# EAGLE board Power module (EAGLE 9.3.1)
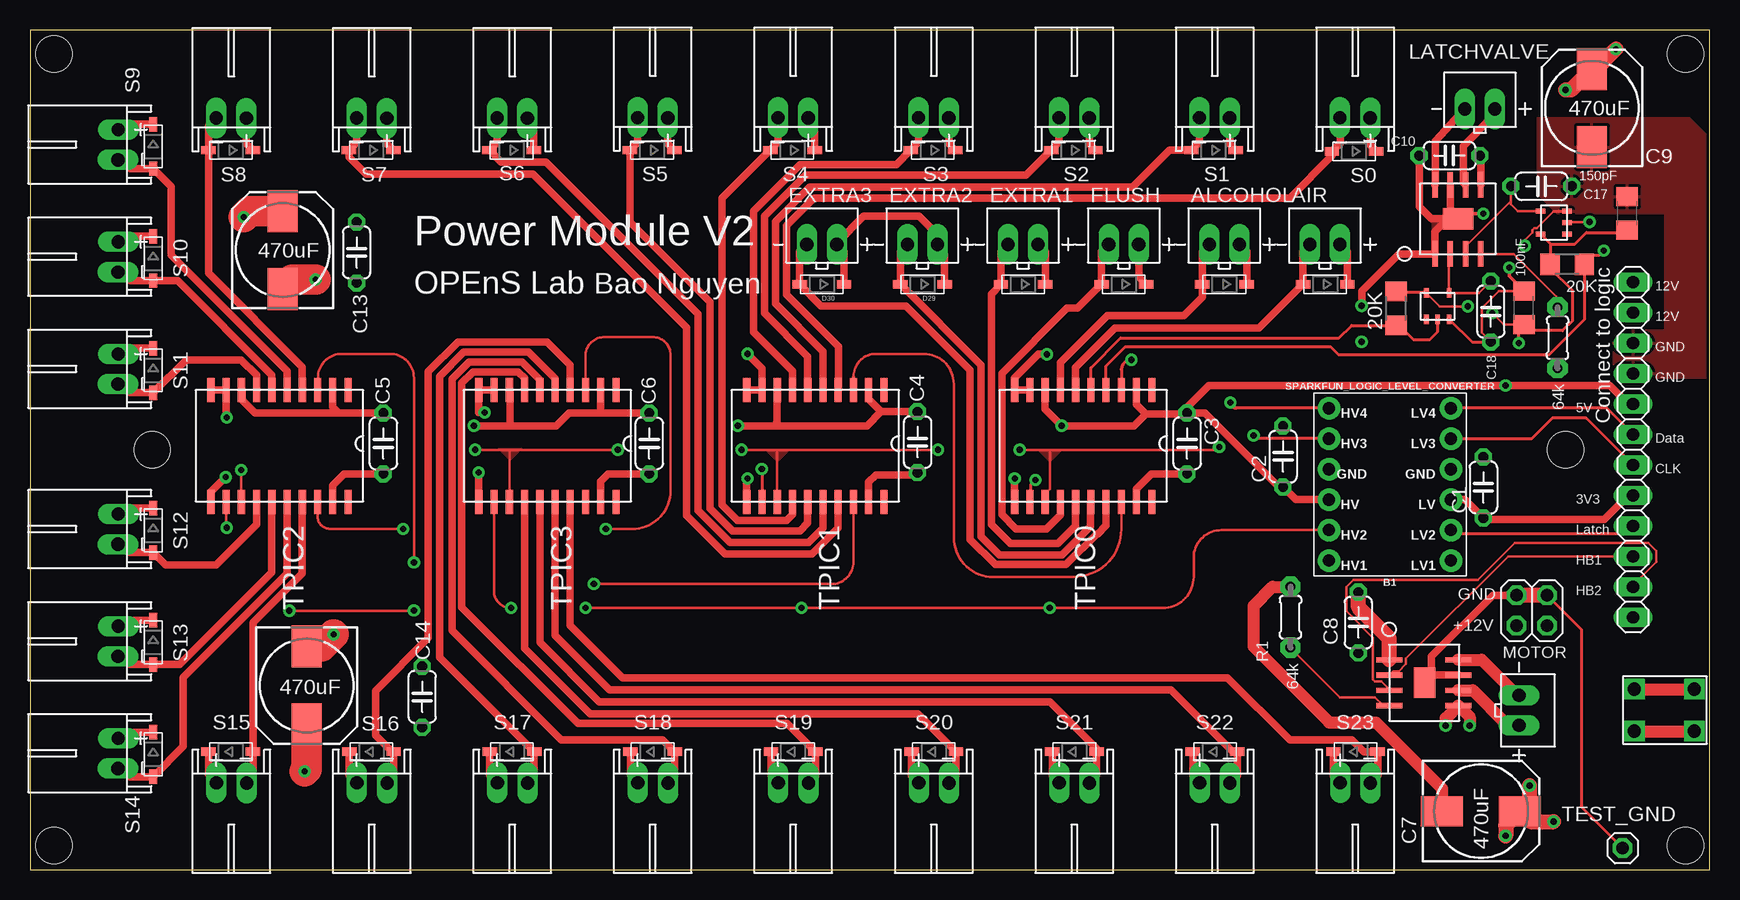
[diagram p0: board, top side]
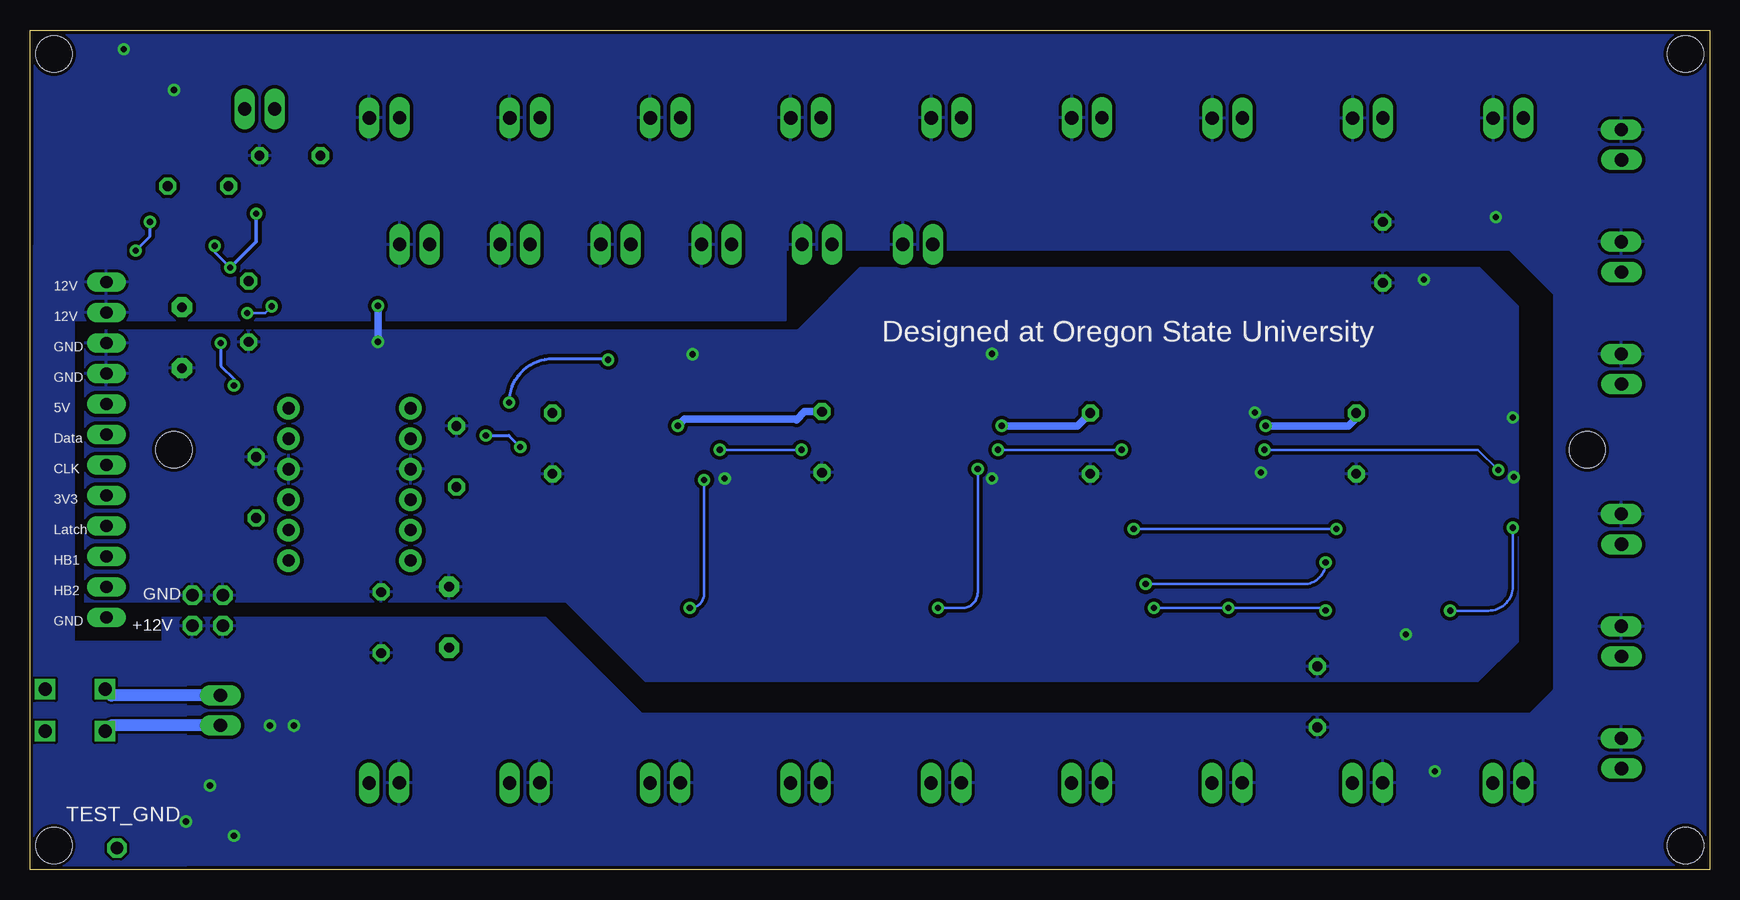
[diagram p1: board, bottom side, seen from below]

Size 140 x 70 mm. Coordinates in mm from the lower left corner, seen from the top.
Outline: 0,0 140,0 140,70 0,70 0,0
Copper layers (1*16): Top 0.035mm / dielectric 1.5mm / Bottom 0.035mm
Design rules "SparkFun": minimum track width 8mil, minimum drill 20mil, track to track 8mil, track to pad 8mil, pad to pad 8mil, via to via 8mil, smd to smd 8mil, copper to edge 10mil, drill to drill 8mil, minimum pad ring 12mil, minimum via ring 10mil, stop-mask expansion 4mil, vias tented up to drill 25mil, thermal gap 10mil
Holes 3 mm at 138,68 138,2 2,2 2,68 10.2,35 128,35

## Footprints (pad centres in the part's own frame; a part is rotated, then mirrored left to right if it is on the bottom)
JST_2POS_2.5MM_UP = drill 1.1 long: 1 -1.25,0; 2 1.25,0
SPARKFUN_LOGIC_LEVEL_CONVERTER = drill 1.016 pad 1.88: GND1 -5.08,-1.27; GND2 5.08,-1.27; HV 5.08,1.27; HV1 5.08,6.35; HV2 5.08,3.81; HV3 5.08,-3.81; HV4 5.08,-6.35; LV -5.08,1.27; LV1 -5.08,6.35; LV2 -5.08,3.81; LV3 -5.08,-3.81; LV4 -5.08,-6.35
C050-024X044 = drill 0.813 octagon: 1 -2.54,0; 2 2.54,0
140CLH-0810 = smd 3.5 x 2.5: + 3.25,0; - -3.25,0
C1206 = smd 1.6 x 1.8: 1 -1.4,0; 2 1.4,0
SOD-123 = smd 1.2 x 0.7: A 1.85,0; C -1.85,0
SOP8 = smd 2.15 x 0.45: 1 -2.54,1.27; 2 -2.54,0; 3 -2.54,-1.27; 4 -2.54,-2.54; 5 3.21,-2.54; 6 3.21,-1.27; 7 3.21,0; 8 3.21,1.27 | smd 1.79 x 2.541: GND 0.381,-0.635
1X12 = drill 1.016 long: 1 -13.97,0; 2 -11.43,0; 3 -8.89,0; 4 -6.35,0; 5 -3.81,0; 6 -1.27,0; 7 1.27,0; 8 3.81,0; 9 6.35,0; 10 8.89,0; 11 11.43,0; 12 13.97,0
2X02 = drill 1.016 octagon: 1 -1.27,-1.27; 2 -1.27,1.27; 3 1.27,-1.27; 4 1.27,1.27
SOT753 = smd 0.8 x 0.4: 1 -1.14,0.95; 2 -1.14,0; 3 -1.14,-0.95; 4 1.06,-0.95; 5 1.06,0.95
0204/5 = drill 0.813 pad 1.676 octagon: 1 -2.54,0; 2 2.54,0
R1206 = smd 1.6 x 1.803: 1 -1.422,0; 2 1.422,0
JST_2POS_2.5MM_ANGLE = drill 1.1 long: 1 1.25,0; 2 -1.27,0.02
1X01 = drill 1.016 octagon: 1 0,0
DIP20 = smd 2 x 0.6: 1 -3.81,5.08; 2 -3.81,3.81; 3 -3.81,2.54; 4 -3.81,1.27; 5 -3.81,0; 6 -3.81,-1.27; 7 -3.81,-2.54; 8 -3.81,-3.81; 9 -3.81,-5.08; 10 -3.81,-6.35; 11 5.49,-6.35; 12 5.49,-5.08; 13 5.49,-3.81; 14 5.49,-2.54; 15 5.49,-1.27; 16 5.49,0; 17 5.49,1.27; 18 5.49,2.54; 19 5.49,3.81; 20 5.49,5.08
3.5MM_DIP2 = drill 1.1 square: 1 -1.778,2.611; 2 -1.778,-2.389; 3 1.722,-2.389; 4 1.722,2.611

## Placement (x,y rotation side)
AIR  2.5MM_JST_UP_2POS  [JST_2POS_2.5MM_UP]  107.95,52.12 0 top
ALCOHOL  2.5MM_JST_UP_2POS  [JST_2POS_2.5MM_UP]  99.56,52.12 0 top
B1  SPARKFUN_LOGIC_LEVEL_CONVERTER  [SPARKFUN_LOGIC_LEVEL_CONVERTER]  113.36,32.11 180 top
C1  100nF  [C050-024X044]  121.15,31.85 90 top
C2  100nF  [C050-024X044]  104.45,34.43 90 top
C3  100nF  [C050-024X044]  96.45,35.53 270 top
C4  100nF  [C050-024X044]  73.98,35.63 270 top
C5  100nF  [C050-024X044]  29.45,35.53 270 top
C6  100nF  [C050-024X044]  51.62,35.53 270 top
C7  470uF  [140CLH-0810]  120.95,4.87 0 top
C8  100nF  [C050-024X044]  110.73,20.59 90 top
C9  470uF  [140CLH-0810]  130.2,63.5 90 top
C10  100nF  [C050-024X044]  118.33,59.53 180 top
C11  100nF  [C1206]  124.53,46.83 90 top
C12  100nF  [C1206]  133.13,54.71 90 top
C13  100nF  [C050-024X044]  27.23,51.45 90 top
C14  100nF  [C050-024X044]  32.69,14.4 270 top
C15  470uF  [140CLH-0810]  21.07,51.65 90 top
C16  470uF  [140CLH-0810]  23.07,15.35 270 top
C17  150pF  [C050-024X044]  125.99,56.97 0 top
C18  150pF  [C050-024X044]  121.77,46.53 270 top
D1  [SOD-123]  110.37,59.88 180 top
D2  [SOD-123]  98.67,59.98 180 top
D3  [SOD-123]  86.96,59.98 180 top
D4  [SOD-123]  75.26,59.98 180 top
D5  [SOD-123]  63.55,59.98 180 top
D6  [SOD-123]  51.85,59.98 180 top
D7  [SOD-123]  40.15,59.98 180 top
D8  [SOD-123]  28.44,59.98 180 top
D9  [SOD-123]  16.74,59.98 180 top
D10  [SOD-123]  10.27,60.29 270 top
D11  [SOD-123]  10.27,50.95 270 top
D12  [SOD-123]  10.27,41.61 270 top
D13  [SOD-123]  10.27,28.28 270 top
D14  [SOD-123]  10.27,18.94 270 top
D15  [SOD-123]  10.27,9.6 270 top
D16  [SOD-123]  16.74,9.82 0 top
D17  [SOD-123]  28.46,9.82 0 top
D18  [SOD-123]  40.18,9.82 0 top
D19  [SOD-123]  51.9,9.82 0 top
D20  [SOD-123]  63.62,9.82 0 top
D21  [SOD-123]  75.34,9.82 0 top
D22  [SOD-123]  87.06,9.82 0 top
D23  [SOD-123]  98.78,9.82 0 top
D24  [SOD-123]  110.5,9.82 0 top
D25  [SOD-123]  107.96,48.8 180 top
D26  [SOD-123]  99.57,48.8 180 top
D27  [SOD-123]  91.18,48.8 180 top
D28  [SOD-123]  82.78,48.8 180 top
D29  [SOD-123]  74.39,48.8 180 top
D30  [SOD-123]  66,48.8 180 top
DRV8871  Motor H-Bridge  [SOP8]  115.85,16.21 0 top
DRV8871-2  Latch H  [SOP8]  118.39,53.87 90 top
EXTRA1  2.5MM_JST_UP_2POS  [JST_2POS_2.5MM_UP]  82.78,52.12 0 top
EXTRA2  2.5MM_JST_UP_2POS  [JST_2POS_2.5MM_UP]  74.39,52.12 0 top
EXTRA3  2.5MM_JST_UP_2POS  [JST_2POS_2.5MM_UP]  66,52.12 0 top
FLUSH  2.5MM_JST_UP_2POS  [JST_2POS_2.5MM_UP]  91.17,52.12 0 top
HEADER  Connect to logic  [1X12]  133.63,35 270 top
JP2  [2X02]  125.19,21.6 0 top
LATCHVALVE  Latch valve JST PH  [JST_2POS_2.5MM_UP]  120.86,63.42 0 top
MOTOR  Motor JST PH  [JST_2POS_2.5MM_UP]  124.12,13.26 270 top
NOTGATE1  [SOT753]  126.99,53.94 180 top
NOTGATE2  [SOT753]  117.34,47.01 90 top
R1  64k  [0204/5]  105.07,21.04 270 top
R2  64k  [0204/5]  127.33,44.34 90 top
R3  20K  [R1206]  128.13,50.47 0 top
R4  20K  [R1206]  113.87,46.79 270 top
S0  2.5MM_JST_ANGLE_2POS  [JST_2POS_2.5MM_ANGLE]  110.46,62.67 0 top
S1  2.5MM_JST_ANGLE_2POS  [JST_2POS_2.5MM_ANGLE]  98.75,62.67 0 top
S2  2.5MM_JST_ANGLE_2POS  [JST_2POS_2.5MM_ANGLE]  87.04,62.67 0 top
S3  2.5MM_JST_ANGLE_2POS  [JST_2POS_2.5MM_ANGLE]  75.33,62.67 0 top
S4  2.5MM_JST_ANGLE_2POS  [JST_2POS_2.5MM_ANGLE]  63.62,62.67 0 top
S5  2.5MM_JST_ANGLE_2POS  [JST_2POS_2.5MM_ANGLE]  51.92,62.67 0 top
S6  2.5MM_JST_ANGLE_2POS  [JST_2POS_2.5MM_ANGLE]  40.21,62.64 0 top
S7  2.5MM_JST_ANGLE_2POS  [JST_2POS_2.5MM_ANGLE]  28.5,62.64 0 top
S8  2.5MM_JST_ANGLE_2POS  [JST_2POS_2.5MM_ANGLE]  16.79,62.64 0 top
S9  2.5MM_JST_ANGLE_2POS  [JST_2POS_2.5MM_ANGLE]  7.36,60.44 90 top
S10  2.5MM_JST_ANGLE_2POS  [JST_2POS_2.5MM_ANGLE]  7.36,51.09 90 top
S11  2.5MM_JST_ANGLE_2POS  [JST_2POS_2.5MM_ANGLE]  7.36,41.74 90 top
S12  2.5MM_JST_ANGLE_2POS  [JST_2POS_2.5MM_ANGLE]  7.36,28.39 90 top
S13  2.5MM_JST_ANGLE_2POS  [JST_2POS_2.5MM_ANGLE]  7.36,19.04 90 top
S14  2.5MM_JST_ANGLE_2POS  [JST_2POS_2.5MM_ANGLE]  7.36,9.69 90 top
S15  2.5MM_JST_ANGLE_2POS  [JST_2POS_2.5MM_ANGLE]  16.79,7.23 180 top
S16  2.5MM_JST_ANGLE_2POS  [JST_2POS_2.5MM_ANGLE]  28.5,7.23 180 top
S17  2.5MM_JST_ANGLE_2POS  [JST_2POS_2.5MM_ANGLE]  40.21,7.23 180 top
S18  2.5MM_JST_ANGLE_2POS  [JST_2POS_2.5MM_ANGLE]  51.92,7.23 180 top
S19  2.5MM_JST_ANGLE_2POS  [JST_2POS_2.5MM_ANGLE]  63.62,7.23 180 top
S20  2.5MM_JST_ANGLE_2POS  [JST_2POS_2.5MM_ANGLE]  75.33,7.23 180 top
S21  2.5MM_JST_ANGLE_2POS  [JST_2POS_2.5MM_ANGLE]  87.04,7.23 180 top
S22  2.5MM_JST_ANGLE_2POS  [JST_2POS_2.5MM_ANGLE]  98.75,7.23 180 top
S23  2.5MM_JST_ANGLE_2POS  [JST_2POS_2.5MM_ANGLE]  110.46,7.23 180 top
TEST_GND  [1X01]  132.75,1.79 0 top
TPIC0  TPIC6B596  [DIP20]  88.43,36.15 270 top
TPIC1  TPIC6B596  [DIP20]  66.1,36.15 270 top
TPIC2  TPIC6B596  [DIP20]  21.43,36.15 270 top
TPIC3  TPIC6B596  [DIP20]  43.76,36.15 270 top
U$1  Motor Push In  [3.5MM_DIP2]  136.13,13.26 270 top

## Library data of the parts
AIR ALCOHOL DRV8871 DRV8871-2 EXTRA1-EXTRA3 FLUSH LATCHVALVE MOTOR NOTGATE1 NOTGATE2 S0 S1-S23 TPIC0 TPIC1-TPIC3 U$1 = eDNA
B1 = SparkFun-Boards
C1-C18 D1-D30 HEADER R1-R4 = adafruit
JP2 TEST_GND = pinhead

## Nets
+3V3: B1.LV C1.1 HEADER.8
+5V: B1.HV C2.1 C3.1 C4.1 C5.1 C6.1 C11.1 C12.1 HEADER.5 NOTGATE1.5 NOTGATE2.5 R3.1 R4.1 TPIC0.2 TPIC0.8 TPIC1.2 TPIC1.8 TPIC2.2 TPIC2.8 TPIC3.2 TPIC3.8
+12V: AIR.2 ALCOHOL.2 C7.+ C8.1 C9.+ C10.1 C13.2 C14.2 C15.+ C16.+ D1.C D2.C D3.C D4.C D5.C D6.C D7.C D8.C D9.C D10.C D11.C D12.C D13.C D14.C D15.C D16.C D17.C D18.C D19.C D20.C D21.C D22.C D23.C D24.C D25.C D26.C D27.C D28.C D29.C D30.C DRV8871-2.5 DRV8871.5 EXTRA1.2 EXTRA2.2 EXTRA3.2 FLUSH.2 HEADER.1 HEADER.2 JP2.1 JP2.3 S0.1 S1.1 S2.1 S3.1 S4.1 S5.1 S6.1 S7.1 S8.1 S9.1 S10.1 S11.1 S12.1 S13.1 S14.1 S15.1 S16.1 S17.1 S18.1 S19.1 S20.1 S21.1 S22.1 S23.1
AIR: AIR.1 D25.A TPIC0.6
ALCOHOL: ALCOHOL.1 D26.A TPIC0.7
GND: B1.GND1 B1.GND2 C1.2 C2.2 C3.2 C4.2 C5.2 C6.2 C7.- C8.2 C9.- C10.2 C11.2 C12.2 C13.1 C14.1 C15.- C16.- C17.2 C18.2 DRV8871-2.1 DRV8871-2.7 DRV8871-2.GND DRV8871.1 DRV8871.7 DRV8871.GND HEADER.3 HEADER.4 JP2.2 JP2.4 NOTGATE1.3 NOTGATE2.3 R1.1 R2.1 TEST_GND.1 TPIC0.9 TPIC0.10 TPIC0.11 TPIC0.19 TPIC1.9 TPIC1.10 TPIC1.11 TPIC1.19 TPIC2.9 TPIC2.10 TPIC2.11 TPIC2.19 TPIC3.9 TPIC3.10 TPIC3.11 TPIC3.19
HB_IN1: DRV8871.2 HEADER.10
HB_IN2: DRV8871.3 HEADER.11
LATCH_H_BRIDGE2: C18.1 DRV8871-2.2 NOTGATE2.4
LATCH_H_BRIGDE1: C17.1 DRV8871-2.3 NOTGATE1.4
LATCHVALVE1: NOTGATE1.2 R3.2 TPIC0.4
LATCHVALVE2: NOTGATE2.2 R4.2 TPIC0.5
MOTOR1: DRV8871.8 MOTOR.1 U$1.1 U$1.2
MOTOR2: DRV8871.6 MOTOR.2 U$1.3 U$1.4
N$1: DRV8871-2.4 R2.2
N$2: DRV8871.4 R1.2
N$3: DRV8871-2.8 LATCHVALVE.1
N$4: DRV8871-2.6 LATCHVALVE.2
S1: D1.A S0.2 TPIC1.4
S2: D2.A S1.2 TPIC1.5
S3: D3.A S2.2 TPIC1.6
S4: D4.A S3.2 TPIC1.7
S5: D5.A S4.2 TPIC1.14
S6: D6.A S5.2 TPIC1.15
S7: D7.A S6.2 TPIC1.16
S8: D8.A S7.2 TPIC1.17
S9: D9.A S8.2 TPIC2.4
S10: D10.A S9.2 TPIC2.5
S11: D11.A S10.2 TPIC2.6
S12: D12.A S11.2 TPIC2.7
S13: D13.A S12.2 TPIC2.14
S14: D14.A S13.2 TPIC2.15
S15: D15.A S14.2 TPIC2.16
S16: D16.A S15.2 TPIC2.17
S17: D17.A S16.2 TPIC3.4
S18: D18.A S17.2 TPIC3.5
S19: D19.A S18.2 TPIC3.6
S20: D20.A S19.2 TPIC3.7
S21: D21.A S20.2 TPIC3.14
S22: D22.A S21.2 TPIC3.15
S23: D23.A S22.2 TPIC3.16
S24: D24.A S23.2 TPIC3.17
SHIFT_CLK: B1.LV3 HEADER.7
SHIFT_DATA: B1.LV4 HEADER.6
SHIFT_LATCH: B1.LV2 HEADER.9
T_DATA: B1.HV4 TPIC0.3
T_DATA1: TPIC0.18 TPIC1.3
T_DATA2: TPIC1.18 TPIC2.3
T_DATA3: TPIC2.18 TPIC3.3
T_RCK: B1.HV2 TPIC0.12 TPIC1.12 TPIC2.12 TPIC3.12
T_SCK: B1.HV3 TPIC0.13 TPIC1.13 TPIC2.13 TPIC3.13
TPIC0_4: D27.A FLUSH.1 TPIC0.14
TPIC0_5: D28.A EXTRA1.1 TPIC0.15
TPIC0_6: D29.A EXTRA2.1 TPIC0.16
TPIC0_7: D30.A EXTRA3.1 TPIC0.17

## Tracks (layer width: path | path; a pad name or v marks a point on that pad's centre or on a via)
+3V3
  Top 0.61: B1.LV 119.62,30.84 C1.1 121.26,29.2 131.24,29.2 133.23,31.19 HEADER.8
+5V  (via drill 0.51)
  Top 0.203: C11.1 122.87,45.43 v121.9,46.4 | v119.84,46.96 117.5,46.96 NOTGATE2.5
  Top 0.254: R3.1 126.79,50.57 | 126.79,50.57 126.79,52.13 | 126.79,52.13 NOTGATE1.5 | R4.1 114.17,48.09 116.37,48.09 NOTGATE2.5 | v124.1,43.9 124.1,45 C11.1 125.03,44.93 127.73,44.93 128.59,45.79 128.59,48.26 126.79,50.06 126.79,50.57 | 126.79,52.13 128.77,52.13 129.75,53.11 132.93,53.11 C12.1
  Top 0.61: C3.1 96.38,38 93,38 | 93,38 92.24,38.76 TPIC0.2 | 93,38 92,37 v86,37 84.62,38.38 TPIC0.8 | v37,37 40,37 | 40,37 43.86,37 44.93,38.07 47.6,38.07 | B1.HV 105.5,30.84 C2.1 104.11,31.89 97.93,38.07 C3.1 | HEADER.5 133.23,38.81 131.68,40.36 v123,40.36 98.28,40.36 96.45,38.53 C3.1 | C4.1 70.95,38.17 | 70.95,38.17 69.91,39.21 TPIC1.2 | C6.1 48.03,38.07 47.6,38.07 | C5.1 25.73,38.07 | TPIC2.2 25.24,38.56 25.73,38.07 | 62,37 59.47,37 v59,37 | 62,37 69.78,37 70.95,38.17 | 62,37 62.29,37.29 TPIC1.8 | TPIC2.8 17.68,39.9 17.68,39.15 18.76,38.07 25.73,38.07 | TPIC3.2 47.57,38.1 47.6,38.07 | 40,37 40,39.91 TPIC3.8
  Bottom 0.203: v121.9,46.4 120.4,46.4 v119.84,46.96
  Bottom 0.254: v124.1,43.9 124.1,42 123,40.9 v123,40.36
  Bottom 0.61: v86,37 85.45,37.55 76.15,37.55 76.1,37.5 75.43,38.17 C4.1 | v59,37 52.69,37 C6.1 | v37,37 30.1,37 29.45,37.65 C5.1
+12V  (via drill 0.51)
  Top 0.61: D10.C 8.06,62.14 S9.1 | D11.C 8.07,52.8 S10.1 | D12.C 8.08,43.46 S11.1 | D13.C 8.1,30.13 S12.1 | D14.C 8.11,20.79 S13.1 | D15.C 8.12,11.45 S14.1 | C10.1 120.93,59.47 DRV8871-2.5 | S8.1 18.04,60.53 D9.C | D8.C 29.75,60.52 S7.1 | S5.1 53.17,60.52 D6.C | S3.1 76.58,60.51 D4.C | S2.1 88.29,60.5 D3.C | S1.1 100,60.49 D2.C | D1.C 111.71,60.39 S0.1 | D30.C 67.85,51.52 EXTRA3.2 67.25,52.25 69.46,54.46 74.1,54.46 75.64,52.92 EXTRA2.2 76.24,51.27 D29.C | D25.C 109.81,51.51 AIR.2 | D26.C 101.42,51.51 ALCOHOL.2 | D28.C 84.63,51.52 EXTRA1.2 | FLUSH.2 92.42,49.41 D27.C | D16.C 14.89,7.88 S15.1 | S16.1 26.61,7.87 D17.C | S17.1 38.33,7.86 D18.C | D19.C 50.05,7.85 S18.1 | D20.C 61.77,7.83 S19.1 | D21.C 73.49,7.82 S20.1 | D22.C 85.21,7.81 S21.1 | D23.C 96.93,7.8 S22.1 | D24.C 108.65,7.79 S23.1 | D7.C 42,62.1 S6.1 | S4.1 65.41,62.14 D5.C
  Top 1.016: v120,12 120,12.73 DRV8871.5 118,12.61 v118,12
  Top 1.27: C7.+ 125,5.67 v125,7 | C7.+ 123,3.67 v123,2.8 | C7.+ 125.07,4 v127,4 | v128,65 128.45,65 C9.+ 130.55,66.75 v132.2,68.4
  Top 2.54: C15.+ 18.3,54.9 v17.8,54.4 | C16.+ 23.07,8.37 v22.9,8.2
  pour Bottom (isolate 0.3): 0,70 140,70 140,45.8 77,45.8 77,51.7 16.7,51.7 13,48 13,15 15,13 89,13 97,21 129,21 129,0 1,0 0,1
  pour Bottom: 132,46 132,52 140,52 140,0 127,0 127,19 136.3,19 136.3,46
AIR
  Top 0.61: TPIC0.6 87.16,41.86 90.44,45.14 102.45,45.14 D25.A 106.11,51.53 AIR.1
ALCOHOL
  Top 0.61: TPIC0.7 85.89,42.29 89.8,46.2 96.2,46.2 97.72,47.72 D26.A 97.72,51.53 ALCOHOL.1
GND  (via drill 0.51)
  Top 0.203: C11.2 122.43,48.23 121,46.8 121,44.76 C18.2 | v124.6,52 124.6,52.49 125.22,53.12 125.22,53.32 125.4,53.49 125.61,53.49 127,54.89
  Top 0.254: 127,54.89 NOTGATE1.3 | NOTGATE2.3 118.33,45.87 120.21,43.99 C18.2 | JP2.4 129.3,20.03 129.3,5.24 TEST_GND.1
  Top 0.305: C11.2 123.3,49.46 v123.3,50.2 | v121.14,54.7 119.47,54.7 DRV8871-2.GND
  Top 0.406: 116.87,16.21 DRV8871.GND
  Top 0.61: v111,47 111,48.21 114.12,51.33 DRV8871-2.1 117.12,53.17 118.2,54.25 | JP2.2 121.93,22.87 116.82,17.76 116.82,16.16 116.87,16.21 DRV8871.7 | DRV8871-2.7 118.39,54.89 DRV8871-2.GND 118.2,54.25 | 118.2,54.25 116.8,54.25 115.8,55.26 C10.2 | v37.9,38.1 37.41,38.1 TPIC3.10 TPIC3.9 | TPIC3.11 37.41,33.09 v37.4,33.1 | v59.8,43 61.02,41.78 TPIC1.9 TPIC1.10 | v59.8,32.6 59.75,32.55 TPIC1.11 | TPIC0.11 82.08,32.59 v82.09,32.6 | TPIC0.19 92.24,31.74 93.49,32.99 C3.2 | v84.76,42.96 84.08,42.96 82.08,40.96 TPIC0.10 TPIC0.9 | TPIC2.19 25.24,32.04 26.19,32.99 C5.2 | TPIC2.10 TPIC2.9 16.35,37.75 v16.4,37.7 | v16.3,32.72 15.08,31.5 TPIC2.11 | TPIC1.19 69.91,32.31 70.5,32.9 73.79,32.9 C4.2 | C6.2 48.19,32.99 47.57,32.37 TPIC3.19
  Top 1.016: C7.- 117.7,6.76 112.2,12.27 108.31,12.27 102,18.57 102,22 103.58,23.58 R1.1
  Top 1.27: DRV8871.1 113.31,19.28 110.73,21.86 C8.2 | JP2.4 JP2.2
  Top 2.54: v23.8,49.2 21.87,49.2 C15.- | v25.3,19.6 24.3,18.6 C16.-
  Bottom 0.254: v124.6,52 124.6,51.5 v123.3,50.2
  Bottom 0.305: v123.3,50.2 121.14,52.36 v121.14,54.7
  Bottom 0.61: v111,47 v111,44
  pour Top: 125.7,62.7 138.3,62.7 140,61 140,41 133,41 132,42 132,44 133,45 136.3,45 136.3,54.7 127.3,54.7 125.7,56.3
  pour Bottom (isolate 0.3): 135.4,45 76,45 70.8,50.2 19.2,50.2 16,47 16,19 19.3,15.7 88.7,15.7 95.3,22.3 135.4,22.3
  pour Top: 116.4,54.4 116.9,53.9 116.9,53.1 118,54.2 118,54.4
HB_IN1
  Top 0.203: HEADER.10 123.21,26.11 114.69,17.59 114.69,17.13 114.1,16.54 113.64,16.54 DRV8871.2
HB_IN2
  Top 0.203: HEADER.11 133.63,23.72 135.56,25.65 135.56,26.57 134.91,27.23 123.75,27.23 120.67,24.15 110.31,24.15 109.71,23.55 109.71,21.55 111.93,19.33 111.93,15.86 112.11,15.68 112.66,15.68 113.4,14.94
  Top 0.254: 113.4,14.94 DRV8871.3
LATCH_H_BRIDGE2
  Top 0.203: DRV8871-2.2 118.29,51.23 NOTGATE2.4 120.77,48.07 C18.1
LATCH_H_BRIGDE1
  Top 0.203: NOTGATE1.4 124.03,54.89 123.45,55.47 C17.1 123.45,55.71 119.66,51.92 DRV8871-2.3
LATCHVALVE1  (via drill 0.51)
  Top 0.203: v130,54 128.19,54 NOTGATE1.2
  Top 0.254: TPIC0.4 89.7,42 91.3,43.6 108.4,43.6 109.05,42.95 126.65,42.95 129.59,45.89 129.59,50.39 | 129.59,50.39 R3.2 | v131.2,51.6 130.8,51.2 130.1,51.2 130.1,50.9 129.59,50.39
  Bottom 0.254: v131.2,51.6 130,52.8 v130,54
LATCHVALVE2
  Top 0.203: 117.34,45.79 NOTGATE2.2
  Top 0.254: TPIC0.5 88.43,41.83 90.92,44.32 109.12,44.32 110.17,45.37 R4.2 114.13,45.37 115.3,44.2 116.7,44.2 117.34,44.84 117.34,45.79
MOTOR1
  Top 1.016: DRV8871.8 121.02,17.48 123.99,14.51 MOTOR.1 | U$1.2 U$1.1
  Bottom 1.016: MOTOR.1 133.21,14.51 U$1.2
MOTOR2
  Top 1.016: DRV8871.6 120.26,14.94 123.08,12.12 MOTOR.2 | U$1.3 U$1.4
  Bottom 1.016: MOTOR.2 133.27,12.01 U$1.3
N$1
  Top 0.203: DRV8871-2.4 120.96,51.3 123.7,51.3 127.24,47.76 R2.2
N$2
  Top 0.203: R1.2 109.2,14.37 112.11,14.37 112.81,13.67 DRV8871.4
N$3
  Top 0.61: LATCHVALVE.1 117.16,60.73 117.16,57.22 117.12,57.18 DRV8871-2.8
N$4
  Top 0.61: DRV8871-2.6 119.46,57.28 119.46,60.32 121.86,62.72 LATCHVALVE.2
S1
  Top 0.61: S0.2 109.21,60.57 D1.A 108.52,59.52 105,56 65.35,56 63.04,53.69 63.04,47.96 67.4,43.6 67.4,39.99 TPIC1.4
S2
  Top 0.61: S1.2 97.48,60.65 D2.A 94.98,59.98 91.9,56.9 65,56.9 62.13,54.03 62.13,47.17 66.1,43.2 TPIC1.5
S3
  Top 0.61: S2.2 85.77,60.64 D3.A 83.01,57.88 64.63,57.88 61.22,54.47 61.22,46.38 64.83,42.77 TPIC1.6
S4
  Top 0.61: S3.2 74.06,60.63 D4.A 72.21,58.78 64.18,58.78 60.3,54.9 60.3,44.8 63.56,41.54 TPIC1.7
S5
  Top 0.61: TPIC1.14 63.56,29.58 63.08,29.1 59,29.1 57.7,30.4 57.7,55.98 D5.A 62.35,60.63 S4.2
S6
  Top 0.61: TPIC1.15 64.82,28.88 64.18,28.24 58.58,28.24 56.7,30.12 56.7,47.3 50,54 D6.A 50.65,60.62 S5.2
S7
  Top 0.61: TPIC1.16 66.09,30.65 66.09,28.48 64.89,27.28 58.37,27.28 55.7,29.95 55.7,46.3 43,59 39.28,59 D7.A 38.94,60.62 S6.2
S8
  Top 0.61: TPIC1.17 67.36,30.65 67.36,28.48 65.2,26.32 57.95,26.32 54.74,29.53 54.74,45.18 41.92,58 28,58 26.59,59.41 D8.A 27.23,60.62 S7.2
S9
  Top 0.61: TPIC2.4 22.7,41.9 14.89,49.71 D9.A 14.89,62.03 S8.2
S10
  Top 0.61: S9.2 8.36,58.44 D10.A 11.77,56.94 11.77,51.23 21.43,41.57 TPIC2.5
S11
  Top 0.61: S10.2 8.35,49.1 D11.A 12.3,49.1 20.16,41.24 TPIC2.6
S12
  Top 0.61: S11.2 8.34,39.76 D12.A 13.01,42.5 17.6,42.5 18.89,41.21 TPIC2.7
S13
  Top 0.61: S12.2 8.32,26.43 D13.A 11.3,25.4 15.5,25.4 18.89,28.79 TPIC2.14
S14
  Top 0.61: S13.2 8.31,17.09 D14.A 12.49,17.09 20.16,24.76 TPIC2.15
S15
  Top 0.61: S14.2 8.3,7.75 D15.A 12.78,10.26 12.78,16.03 21.43,24.68 TPIC2.16
S16
  Top 0.61: TPIC2.17 22.7,24.7 18.59,20.59 D16.A 18.59,7.74 S15.2
S17
  Top 0.61: S16.2 30.31,7.75 D17.A 30.18,9.82 28.8,11.2 28.8,14.9 33.2,19.3 33.2,41.51 35.69,44 43.1,44 45.03,42.07 TPIC3.4
S18
  Top 0.61: S17.2 42.03,7.76 D18.A 34.16,17.69 34.16,41.12 36.16,43.13 41.57,43.13 43.76,40.94 TPIC3.5
S19
  Top 0.61: S18.2 53.75,7.77 D19.A 52.75,10.82 44.28,10.82 35.17,19.93 35.17,40.89 36.6,42.31 41.04,42.31 41.58,41.77 | 41.58,41.77 | 41.58,41.77 42.49,40.86 TPIC3.6
S20
  Top 0.61: S19.2 65.47,7.79 D20.A 63.1,12.19 45.67,12.19 35.98,21.87 35.98,40.55 36.94,41.5 40.7,41.5 41.22,40.98 TPIC3.7
S21
  Top 0.61: TPIC3.14 41.24,30.65 41.24,18.43 46.67,13 74,13 D21.A 77.19,7.8 S20.2
S22
  Top 0.61: TPIC3.15 42.5,18.94 47.45,14 85,14 88.91,10.09 D22.A 88.91,7.81 S21.2
S23
  Top 0.61: TPIC3.16 43.76,19.54 48.3,15 95.1,15 100.28,9.82 D23.A 100.63,7.82 S22.2
S24
  Top 0.61: S23.2 112.35,7.83 D24.A 111.18,9.82 110.2,10.8 105,10.8 99.8,16 49.4,16 45.03,20.37 TPIC3.17
SHIFT_CLK
  Top 0.254: B1.LV3 118.46,35.9 125.16,35.9 126.91,37.64 129.72,37.64 HEADER.7
SHIFT_DATA
  Top 0.254: HEADER.6 131.43,38.47 B1.LV4
SHIFT_LATCH
  Top 0.254: B1.LV2 118.74,28 132.98,28 HEADER.9
T_DATA  (via drill 0.51)
  Top 0.254: B1.HV4 100.54,38.46 arc-90 v100.05,38.95 | v91.8,42.5 arc90 90.97,41.67 TPIC0.3
  Bottom 0.254: v100.05,38.95 arc90 96.4,42.6 91.9,42.6 v91.8,42.5
T_DATA1
  Top 0.203: TPIC0.18 90.97,28.37 arc-90 87,24.4 80.3,24.4 arc-90 77,27.7 77,40.5 arc90 74.5,43 70.54,43 arc90 68.64,41.1
  Top 0.254: 68.64,41.1 TPIC1.3
T_DATA2  (via drill 0.51)
  Top 0.203: TPIC1.18 68.64,25.64 arc-90 66.8,23.8 v47,23.8 | v32,25.6 32,41 arc90 30,43 26,43 arc90 24,41 24,39.99 arc-90 TPIC2.3
  Bottom 0.203: v47,23.8 33.8,23.8 arc-90 v32,25.6
T_DATA3  (via drill 0.51)
  Top 0.203: v31.1,28.4 25.03,28.4 arc-90 23.97,29.46 TPIC2.18 | v48,28.4 50.2,28.4 arc90 53.4,31.6 53.4,42.9 arc90 51.9,44.4 47.9,44.4 arc90 46.3,42.8 46.3,40.03 arc-90 46.27,40
  Top 0.254: 46.27,40 arc90 TPIC3.3
  Bottom 0.203: v48,28.4 v31.1,28.4
T_RCK  (via drill 0.51)
  Top 0.203: B1.HV2 99.3,28.3 arc90 97,26 97,24.4 arc-90 94.4,21.8 v85,21.8 v64.3,21.8 v46.3,21.8 | TPIC3.12 38.68,23.22 arc90 v40.1,21.8 | TPIC2.12 16.35,28.55 v16.4,28.5 | v32,21.6 31.98,21.58 v21.62,21.58
  Top 0.254: v83.8,32.49 83.4,32.09 83.4,31.6 83.35,31.55 TPIC0.12 | v61,33.4 61,30.68 TPIC1.12
  Bottom 0.203: v85,21.8 arc-90 83.8,23 v83.8,32.49 | v61,33.4 61,23.1 arc90 62.3,21.8 v64.3,21.8 | v46.3,21.8 v40.1,21.8 32.2,21.8 v32,21.6 | v16.4,28.5 16.4,23.6 arc90 18.42,21.58 v21.62,21.58
T_SCK  (via drill 0.51)
  Top 0.203: 98.9,35 85,35 | 85,35 v82.5,35 | 39.96,35 39.96,30.67 | v37.1,35 39.96,35 | 85,35 85,31.74 84.62,31.36 | v59.3,35 62.29,35 | 62.29,35 v75.7,35 | 62.29,35 TPIC1.13 | v17.6,33.3 17.6,30.68 TPIC2.13 | v49,35 39.96,35
  Top 0.254: B1.HV3 102.28,35.92 v102,36.2 | v99.13,35.23 98.9,35 | TPIC3.13 39.96,30.67 | 84.62,31.36 TPIC0.13
  Bottom 0.203: v82.5,35 v75.7,35 | v37.1,35 19.3,35 v17.6,33.3 | v59.3,35 v49,35
  Bottom 0.254: v102,36.2 100.1,36.2 v99.13,35.23
  pour Top: 39,35.1 40,34.1 41,35.1
  pour Top: 84,35 85,34 86,35
  pour Top: 61.3,35 62.3,34 63.3,35
TPIC0_4
  Top 0.61: TPIC0.14 85.88,30.65 85.88,29.57 84.71,28.4 82.19,28.4 81,29.59 81,41.35 86.45,46.8 87.33,46.8 D27.A 89.33,51.53 FLUSH.1
TPIC0_5
  Top 0.61: EXTRA1.1 80.93,51.52 D28.A 80.13,47.99 80.13,28.79 81.72,27.2 85.7,27.2 87.16,28.66 TPIC0.15
TPIC0_6
  Top 0.61: EXTRA2.1 72.54,51.52 D29.A 79.26,42.08 79.26,27.77 80.8,26.24 86.04,26.24 88.4,28.6 88.4,30.63 TPIC0.16
TPIC0_7
  Top 0.61: EXTRA3.1 64.15,51.52 D30.A 65.95,47 73,47 78.35,41.65 78.35,27.54 80.46,25.43 86.38,25.43 88.95,28 89,28 89.7,28.7 TPIC0.17

## Text on the board
tPlace: C17 | Power Module V2 | 470uF | OPEnS Lab | Bao Nguyen | 12V | 12V | GND | GND | 64k | 5V | Data | CLK | 3V3 | Latch | HB1 | HB2 | GND | +12V | 470uF
bPlace: 12V | 12V | Designed at Oregon State University | GND | GND | 5V | Data | CLK | 3V3 | Latch | HB1 | HB2 | GND | +12V | GND | TEST_GND